# EAGLE board wagband_schematic (EAGLE 7.5.0)
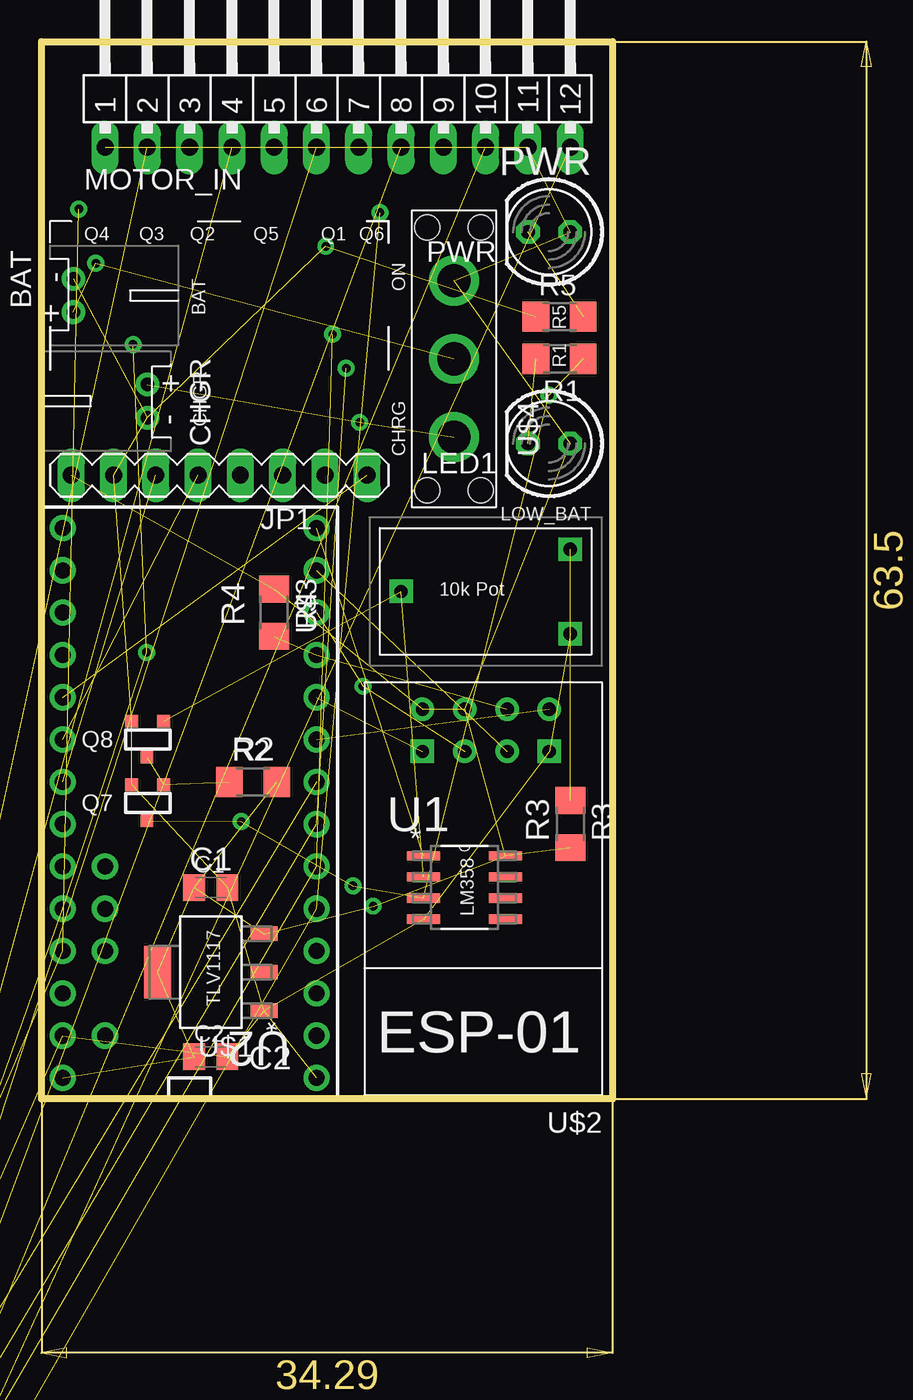
[diagram p0: board, top side]
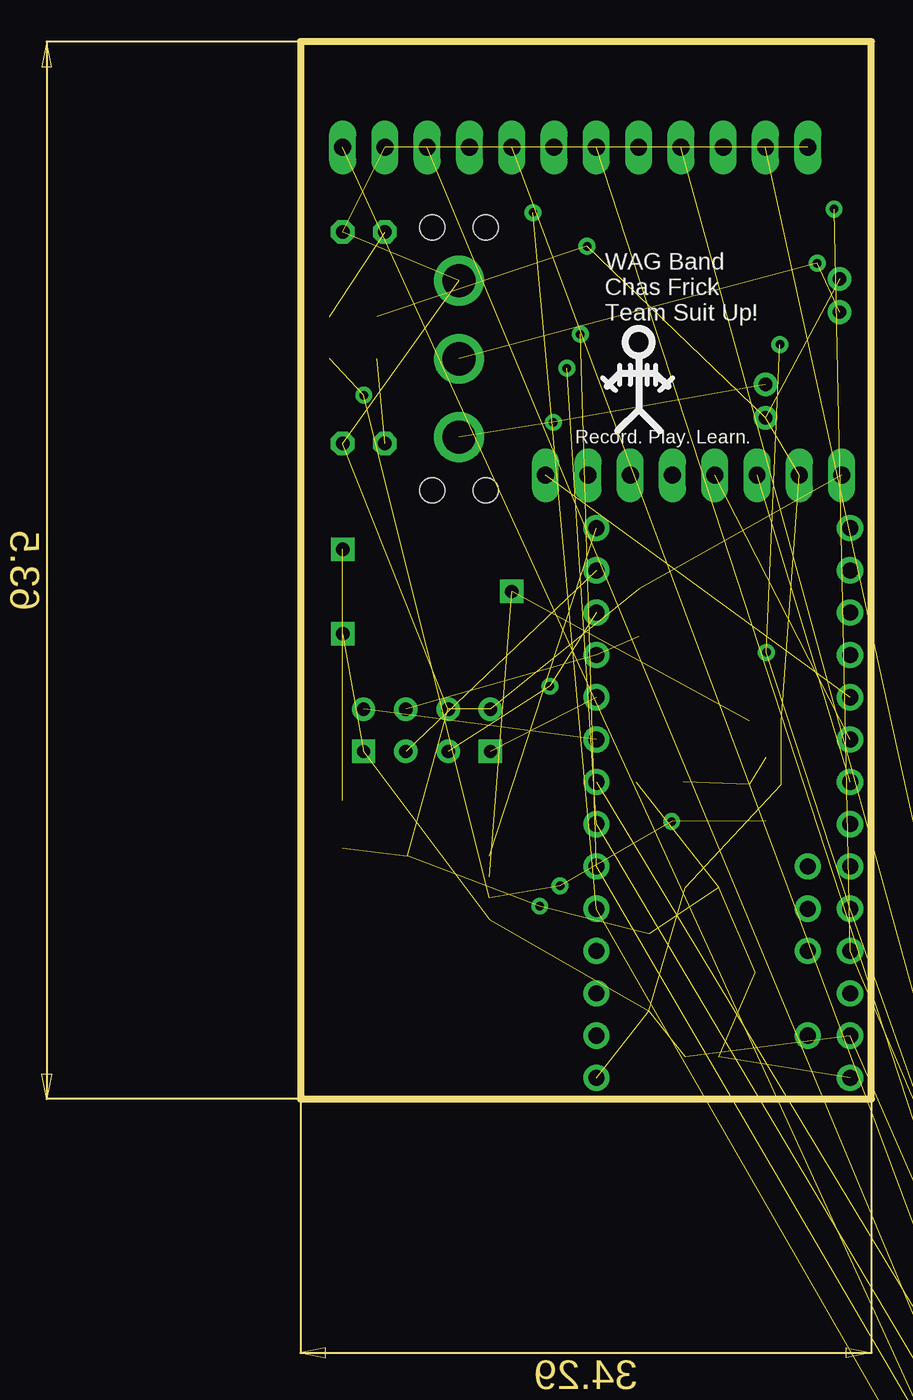
[diagram p1: board, bottom side, seen from below]

Size 34.29 x 63.5 mm. Coordinates in mm from the lower left corner, seen from the top.
Outline: 0,0 0,63.5 34.29,63.5 34.29,0 0,0
Copper layers (1*16): Top 0.035mm / dielectric 1.5mm / Bottom 0.035mm
Design rules "SparkFun": minimum track width 8mil, minimum drill 20mil, track to track 8mil, track to pad 8mil, pad to pad 8mil, via to via 8mil, smd to smd 8mil, copper to edge 8mil, drill to drill 8mil, minimum pad ring 12mil, minimum via ring 10mil, stop-mask expansion 4mil, vias tented up to drill 20mil, thermal gap 10mil
Net classes: 0 default: width 0.305 mm; 1 GND: width 0.406 mm; 2 VCC: width 0.406 mm

## Footprints (pad centres in the part's own frame; a part is rotated, then mirrored left to right if it is on the bottom)
JST-PH-2-THM-RA = drill 0.8 pad 1.422: 1 1,0; 2 -1,0
C0805K = smd 1.3 x 1.6: 1 -1,0; 2 1,0
MPU6050 = drill 1.016 long: ADD 6.35,0; GND -6.35,0; INT 8.89,0; SCL -3.81,0; SDA -1.27,0; VCC -8.89,0; XCL 3.81,0; XDA 1.27,0
LED5MM = drill 0.813 octagon: A -1.27,0; K 1.27,0
MA12-1W = drill 1.016 long: 1 -13.97,0; 2 -11.43,0; 3 -8.89,0; 4 -6.35,0; 5 -3.81,0; 6 -1.27,0; 7 1.27,0; 8 3.81,0; 9 6.35,0; 10 8.89,0; 11 11.43,0; 12 13.97,0
SOT-23 = smd 0.762 x 0.762: 1 -0.979,-1.101; 2 0.94,-1.101; 3 0.025,1.067
R1206 = smd 1.6 x 1.803: 1 -1.422,0; 2 1.422,0
SOIC127P600X175-8N = smd 1.981 x 0.559: 1 -2.464,1.905; 2 -2.464,0.635; 3 -2.464,-0.635; 4 -2.464,-1.905; 5 2.464,-1.905; 6 2.464,-0.635; 7 2.464,0.635; 8 2.464,1.905
SOT230P700X180-4N = smd 1.626 x 0.889: 1 -3.2,2.311; 2 -3.2,0; 3 -3.2,-2.311 | smd 1.626 x 3.175: 4 3.2,0
TEENSY3-DIL+4 = drill 0.965: 0 -7.62,13.97; 1 -7.62,11.43; 2 -7.62,8.89; 3 -7.62,6.35; 3.3V 7.62,11.43; 4 -7.62,3.81; 5 -7.62,1.27; 6 -7.62,-1.27; 7 -7.62,-3.81; 8 -7.62,-6.35; 9 -7.62,-8.89; 10 -7.62,-11.43; 11 -7.62,-13.97; 12 -7.62,-16.51; 13 7.62,-16.51; 14/A0 7.62,-13.97; 15/A1 7.62,-11.43; 16/A2 7.62,-8.89; 17/A3 7.62,-6.35; 18/A4 7.62,-3.81; 19/A5 7.62,-1.27; 20/A6 7.62,1.27; 21/A7 7.62,3.81; 22/A8 7.62,6.35; 23/A9 7.62,8.89; A10 5.08,6.35; A11 5.08,3.81; AGND 7.62,13.97; AREF 5.08,8.89; GND -7.62,16.51; VIN 7.62,16.51; VUSB 5.08,13.97
ESP01 = drill 0.8: CH_PD -1.285,-8.178; GPIO0 1.255,-5.638; GPIO2 -1.285,-5.638; RST 1.255,-8.178; TX -3.825,-8.178; VCC 3.795,-8.178 | drill 0.8 square: GND -3.825,-5.638; RX 3.795,-5.638
CB10 = drill 0.8 square: P$1 -2.54,-5.08; P$2 2.54,-5.08; P$3 0,5.08
SPDT = drill 2: P$1 0,-4.699; P$2 0,0; P$3 0,4.699 | hole 1.5: 1.6,7.899; -1.6,-7.899; 1.6,-7.899; -1.6,7.899

## Placement (x,y rotation side)
BAT  [JST-PH-2-THM-RA]  1.91,48.26 270 top
C1  105  [C0805K]  10.16,12.7 0 top
C2  105  [C0805K]  10.16,2.54 0 top
CHGR  [JST-PH-2-THM-RA]  6.35,41.91 90 top
JP1  [MPU6050]  10.67,37.47 0 top
LED1  [LED5MM]  30.48,39.37 180 top
MOTOR_IN  [MA12-1W]  17.78,57.15 0 top
PWR  [LED5MM]  30.48,52.07 180 top
Q1  [SOT-23]  -10.16,-32.26 0 top  (outside the outline)
Q2  [SOT-23]  -10.16,-25.65 0 top  (outside the outline)
Q3  [SOT-23]  -10.16,-22.35 0 top  (outside the outline)
Q4  [SOT-23]  -10.16,-19.05 0 top  (outside the outline)
Q5  [SOT-23]  -10.16,-28.96 0 top  (outside the outline)
Q6  [SOT-23]  -10.16,-35.56 0 top  (outside the outline)
Q7  [SOT-23]  6.35,17.78 180 top
Q8  [SOT-23]  6.35,21.59 180 top
R1  1k  [R1206]  31.11,44.45 180 top
R2  30k  [R1206]  12.7,19.05 0 top
R3  30k  [R1206]  31.75,16.51 270 top
R4  10k  [R1206]  13.97,29.21 270 top
R5  1k  [R1206]  31.11,46.99 0 top
U1  LM358DR  [SOIC127P600X175-8N]  25.4,12.7 0 top
U2  TLV1117-33CDCY  [SOT230P700X180-4N]  10.16,7.62 180 top
U$1  TEENSY_3.1_DIL+4  [TEENSY3-DIL+4]  8.89,17.78 180 top
U$2  ESP01  [ESP01]  26.67,15.24 180 top
U$3  CB10LV103M  [CB10]  26.67,30.48 90 top
U$4  MS12ASW13  [SPDT]  24.77,44.45 0 top

## Library data of the parts
BAT CHGR = adafruit
C1 C2 R1-R5 = resistor
JP1 Q1-Q8 U$3 U$4 = mqp_custom_parts
LED1 PWR = led
MOTOR_IN = con-lstb; OC_FARNELL: unknown; OC_NEWARK: unknown
U1 = Texas Instruments_By_element14_Batch_1; MPN: LM358DR; OC_FARNELL: 1831865; OC_NEWARK: 34K7599; PACKAGE: SOIC-8; SUPPLIER: Texas Instruments
U2 = Texas Instruments_By_element14_Batch_1; MPN: TLV1117-33CDCY; OC_FARNELL: 1494942; OC_NEWARK: 67K8520; PACKAGE: SOT-223-3; SUPPLIER: TEXAS INSTRUMENTS
U$1 = Teensy_3_and_LC_Series_Boards_v1.1
U$2 = esp8266modules

## Nets
3.3V: U$1.3.3V
AREF: U$1.AREF
GND [GND]: BAT.2 C1.2 C2.2 CHGR.2 JP1.GND Q1.2 Q2.2 Q3.2 Q4.2 Q5.2 Q6.2 Q7.2 Q8.2 R5.1 U1.4 U2.1 U$1.AGND U$1.GND U$2.GND U$3.P$1
N$1: Q4.1 U$1.23/A9
N$2: Q2.1 U$1.6
N$3: Q3.1 U$1.22/A8
N$4: JP1.SDA U$1.18/A4
N$5: Q6.1 U$1.3
N$6: Q1.1 U$1.4
N$7: U$1.7 U$2.TX
N$8: JP1.INT U$1.17/A3
N$9: MOTOR_IN.12 Q6.3
N$10: MOTOR_IN.10 Q1.3
N$11: MOTOR_IN.8 Q5.3
N$12: U$1.8 U$2.RX
N$13: MOTOR_IN.6 Q2.3
N$14: MOTOR_IN.2 Q4.3
N$15: MOTOR_IN.4 Q3.3
N$16: Q5.1 U$1.5
N$17: JP1.SCL U$1.19/A5
N$18: U$1.11 U$2.GPIO2
N$19: U$1.10 U$2.GPIO0
N$20: Q7.3 R1.1 U1.3
N$21: PWR.K R5.2
N$22: LED1.K R1.2
N$23: Q7.1 Q8.3 R2.1
N$24: R4.2 U$1.9 U$2.CH_PD
N$25: Q8.1 U1.2 U$3.P$3
N$26: U1.1 U$1.12
N$27: R3.1 U$3.P$2
N$28: BAT.1 U$4.P$2
N$29 [VCC]: CHGR.1 U$4.P$1
VCC: C1.1 C2.1 JP1.VCC LED1.A MOTOR_IN.1 MOTOR_IN.3 MOTOR_IN.5 MOTOR_IN.7 MOTOR_IN.9 MOTOR_IN.11 PWR.A R2.2 R3.2 R4.1 U1.8 U2.3 U2.4 U$1.VIN U$2.RST U$2.VCC U$4.P$3
VUSB: U$1.VUSB

## Tracks (layer width: path | path; a pad name or v marks a point on that pad's centre or on a via)
GND  (via drill 0.51)  (20 unrouted)
  other vias: 17.07,51.21
N$1  (via drill 0.51)  (2 unrouted)
  other vias: 2.24,53.44
N$2  (1 unrouted)
N$3  (via drill 0.51)  (3 unrouted)
  other vias: 5.49,45.31 6.3,26.82
N$4  (1 unrouted)
N$5  (via drill 0.51)  (2 unrouted)
  other vias: 20.32,53.24
N$6  (via drill 0.51)  (2 unrouted)
  other vias: 17.48,45.92
N$7  (1 unrouted)
N$8  (1 unrouted)
N$9  (1 unrouted)
N$10  (1 unrouted)
N$11  (1 unrouted)
N$12  (1 unrouted)
N$13  (1 unrouted)
N$14  (1 unrouted)
N$15  (1 unrouted)
N$16  (via drill 0.51)  (2 unrouted)
  other vias: 18.29,43.89
N$17  (1 unrouted)
N$18  (1 unrouted)
N$19  (via drill 0.51)  (2 unrouted)
  other vias: 19.3,24.79
N$20  (via drill 0.51)  (5 unrouted)
  other vias: 11.99,16.66 18.69,12.8 30.48,42.27
N$21  (1 unrouted)
N$22  (1 unrouted)
N$23  (2 unrouted)
N$24  (2 unrouted)
N$25  (2 unrouted)
N$26  (1 unrouted)
N$27  (1 unrouted)
N$28  (via drill 0.51)  (2 unrouted)
  other vias: 3.25,50.19
N$29  (via drill 0.51)  (2 unrouted)
  other vias: 19.1,40.64
VCC  (via drill 0.51)  (21 unrouted)
  other vias: 19.91,11.58

## Text on the board
tPlace: PWR | Q4 | Q3 | Q2 | Q5 | Q1 | Q6 | BAT | ON | R5 | R1 | CHGR | CHRG | LOW_BAT | 10k Pot | R4 | R2 | R3 | C1 | LM358 | TLV1117 | C2
bPlace: WAG Band / Chas Frick / Team Suit Up! | Record. Play. Learn.